# EAGLE board untitled (EAGLE 8.1.1), part 1 of 18
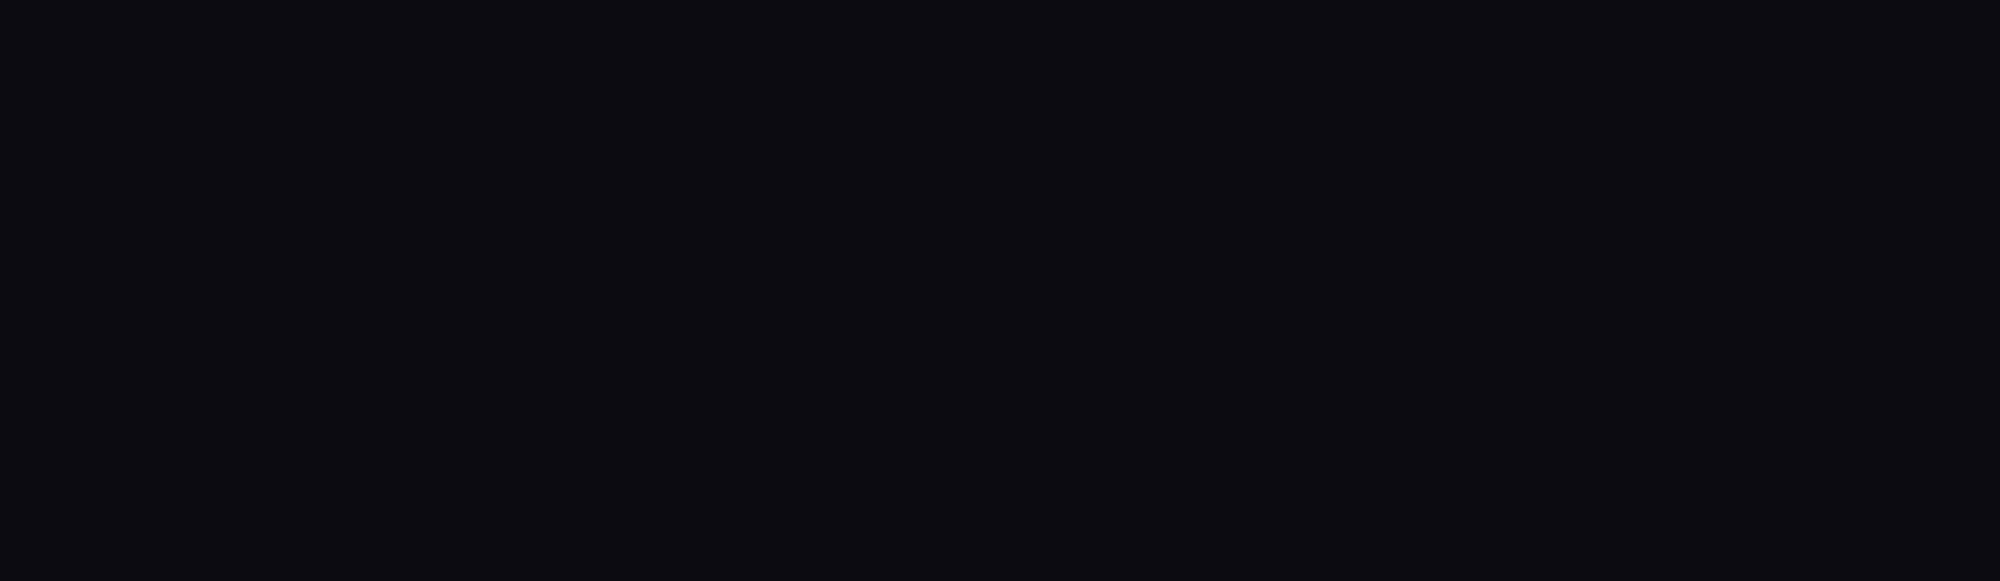
[diagram p0: board, top side]
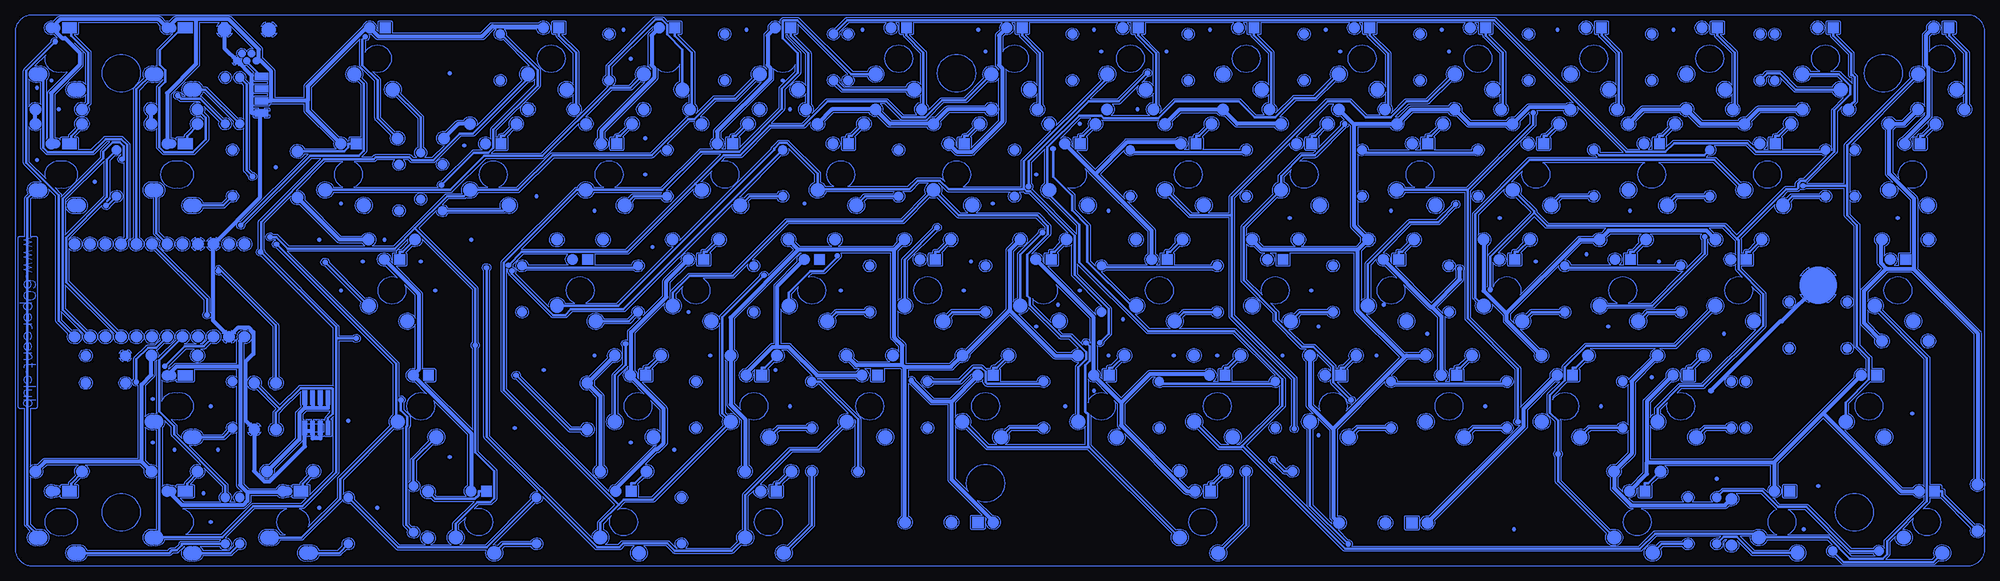
[diagram p1: board, bottom side, seen from below]

No outline drawn. Coordinates in mm, seen from the top.
Copper layers (1*16): Top 0.035mm / dielectric 1.5mm / Bottom 0.035mm
Design rules "default": minimum track width 10mil, minimum drill 24mil, track to track 8mil, track to pad 8mil, pad to pad 8mil, via to via 8mil, smd to smd 8mil, copper to edge 40mil, drill to drill 8mil, minimum pad ring 10mil, minimum via ring 8mil, stop-mask expansion 4mil, vias tented up to drill 0mil, thermal gap 10mil

## Placement (x,y rotation side)

## Tracks (layer width: path | path; a pad name or v marks a point on that pad's centre or on a via)
S$1
  Bottom 0: 2.47,90.26 2.3,90.29
S$2
  Bottom 0: 2.3,90.29 2.12,90.33
S$3
  Bottom 0: 2.12,90.33 1.95,90.39
S$4
  Bottom 0: 1.95,90.39 1.79,90.45
S$5
  Bottom 0: 1.79,90.45 1.62,90.53
S$6
  Bottom 0: 1.62,90.53 1.47,90.62
S$7
  Bottom 0: 1.47,90.62 1.32,90.71
S$8
  Bottom 0: 1.32,90.71 1.17,90.82
S$9
  Bottom 0: 1.17,90.82 1.03,90.93
S$10
  Bottom 0: 1.03,90.93 0.9,91.05
S$11
  Bottom 0: 0.9,91.05 0.78,91.19
S$12
  Bottom 0: 0.78,91.19 0.67,91.32
S$13
  Bottom 0: 0.67,91.32 0.56,91.47
S$14
  Bottom 0: 0.56,91.47 0.46,91.62
S$15
  Bottom 0: 0.46,91.62 0.38,91.78
S$16
  Bottom 0: 0.38,91.78 0.3,91.94
S$17
  Bottom 0: 0.3,91.94 0.23,92.11
S$18
  Bottom 0: 0.23,92.11 0.17,92.28
S$19
  Bottom 0: 0.17,92.28 0.13,92.45
S$20
  Bottom 0: 0.13,92.45 0.09,92.62
S$21
  Bottom 0: 0.09,92.62 0.09,92.65
S$22
  Bottom 0: 0.09,92.65 0.09,177.18
S$23
  Bottom 0: 0.09,177.18 0.09,178.37
S$24
  Bottom 0: 0.09,178.37 0.13,178.55
S$25
  Bottom 0: 0.13,178.55 0.17,178.72
S$26
  Bottom 0: 0.17,178.72 0.23,178.89
S$27
  Bottom 0: 0.23,178.89 0.29,179.06
S$28
  Bottom 0: 0.29,179.06 0.37,179.22
S$29
  Bottom 0: 0.37,179.22 0.45,179.38
S$30
  Bottom 0: 0.45,179.38 0.55,179.53
S$31
  Bottom 0: 0.55,179.53 0.65,179.68
S$32
  Bottom 0: 0.65,179.68 0.77,179.81
S$33
  Bottom 0: 0.77,179.81 0.89,179.94
S$34
  Bottom 0: 0.89,179.94 1.02,180.07
S$35
  Bottom 0: 1.02,180.07 1.16,180.18
S$36
  Bottom 0: 1.16,180.18 1.3,180.29
S$37
  Bottom 0: 1.3,180.29 1.46,180.39
S$38
  Bottom 0: 1.46,180.39 1.61,180.47
S$39
  Bottom 0: 1.61,180.47 1.77,180.55
S$40
  Bottom 0: 1.77,180.55 1.94,180.61
S$41
  Bottom 0: 1.94,180.61 2.11,180.67
S$42
  Bottom 0: 2.11,180.67 2.29,180.72
S$43
  Bottom 0: 2.29,180.72 2.46,180.75
S$44
  Bottom 0: 2.46,180.75 2.48,180.75
S$45
  Bottom 0: 2.48,180.75 2.47,180.76
S$46
  Bottom 0: 2.47,180.76 321.59,180.76
S$47
  Bottom 0: 321.59,180.76 321.59,180.75
S$48
  Bottom 0: 321.59,180.75 321.77,180.72
S$49
  Bottom 0: 321.77,180.72 321.94,180.68
S$50
  Bottom 0: 321.94,180.68 322.12,180.62
S$51
  Bottom 0: 322.12,180.62 322.28,180.55
S$52
  Bottom 0: 322.28,180.55 322.45,180.48
S$53
  Bottom 0: 322.45,180.48 322.6,180.39
S$54
  Bottom 0: 322.6,180.39 322.75,180.3
S$55
  Bottom 0: 322.75,180.3 322.9,180.19
S$56
  Bottom 0: 322.9,180.19 323.04,180.08
S$57
  Bottom 0: 323.04,180.08 323.17,179.95
S$58
  Bottom 0: 323.17,179.95 323.29,179.83
S$59
  Bottom 0: 323.29,179.83 323.41,179.69
S$60
  Bottom 0: 323.41,179.69 323.51,179.55
S$61
  Bottom 0: 323.51,179.55 323.61,179.39
S$62
  Bottom 0: 323.61,179.39 323.7,179.23
S$63
  Bottom 0: 323.7,179.23 323.77,179.07
S$64
  Bottom 0: 323.77,179.07 323.84,178.91
S$65
  Bottom 0: 323.84,178.91 323.9,178.74
S$66
  Bottom 0: 323.9,178.74 323.94,178.56
S$67
  Bottom 0: 323.94,178.56 323.98,178.39
S$68
  Bottom 0: 323.98,178.39 323.98,92.64
S$69
  Bottom 0: 323.98,92.64 323.95,92.47
S$70
  Bottom 0: 323.95,92.47 323.9,92.29
S$71
  Bottom 0: 323.9,92.29 323.85,92.12
S$72
  Bottom 0: 323.85,92.12 323.78,91.95
S$73
  Bottom 0: 323.78,91.95 323.7,91.79
S$74
  Bottom 0: 323.7,91.79 323.62,91.63
S$75
  Bottom 0: 323.62,91.63 323.52,91.48
S$76
  Bottom 0: 323.52,91.48 323.42,91.33
S$77
  Bottom 0: 323.42,91.33 323.3,91.2
S$78
  Bottom 0: 323.3,91.2 323.18,91.06
S$79
  Bottom 0: 323.18,91.06 323.05,90.94
S$80
  Bottom 0: 323.05,90.94 322.92,90.83
S$81
  Bottom 0: 322.92,90.83 322.77,90.72
S$82
  Bottom 0: 322.77,90.72 322.62,90.63
S$83
  Bottom 0: 322.62,90.63 322.46,90.54
S$84
  Bottom 0: 322.46,90.54 322.3,90.46
S$85
  Bottom 0: 322.3,90.46 322.13,90.39
S$86
  Bottom 0: 322.13,90.39 321.96,90.34
S$87
  Bottom 0: 321.96,90.34 321.79,90.29
S$88
  Bottom 0: 321.79,90.29 321.61,90.26
S$89
  Bottom 0: 321.61,90.26 321.59,90.26
S$90
  Bottom 0: 321.59,90.26 2.47,90.26
S$91
  Bottom 0: 8.56,90.4 23.3,90.4
S$92
  Bottom 0: 23.3,90.4 23.37,90.4
S$93
  Bottom 0: 23.37,90.4 23.44,90.42
S$94
  Bottom 0: 23.44,90.42 23.5,90.44
S$95
  Bottom 0: 23.5,90.44 23.56,90.48
S$96
  Bottom 0: 23.56,90.48 23.62,90.53
S$97
  Bottom 0: 23.62,90.53 24.77,91.68
S$98
  Bottom 0: 24.77,91.68 24.87,91.65
S$99
  Bottom 0: 24.87,91.65 25.18,91.63
S$100
  Bottom 0: 25.18,91.63 25.47,91.69
S$101
  Bottom 0: 25.47,91.69 25.73,91.85
S$102
  Bottom 0: 25.73,91.85 25.94,92.06
S$103
  Bottom 0: 25.94,92.06 26.07,92.34
S$104
  Bottom 0: 26.07,92.34 26.12,92.64
S$105
  Bottom 0: 26.12,92.64 26.07,92.94
S$106
  Bottom 0: 26.07,92.94 25.94,93.21
S$107
  Bottom 0: 25.94,93.21 25.73,93.43
S$108
  Bottom 0: 25.73,93.43 25.47,93.58
S$109
  Bottom 0: 25.47,93.58 25.18,93.65
S$110
  Bottom 0: 25.18,93.65 25.14,93.64
S$111
  Bottom 0: 25.14,93.64 25.92,94.43
S$112
  Bottom 0: 25.92,94.43 35.92,94.43
S$113
  Bottom 0: 35.92,94.43 35.94,94.36
S$114
  Bottom 0: 35.94,94.36 36.11,94.05
S$115
  Bottom 0: 36.11,94.05 36.35,93.79
S$116
  Bottom 0: 36.35,93.79 36.65,93.6
S$117
  Bottom 0: 36.65,93.6 36.98,93.5
S$118
  Bottom 0: 36.98,93.5 37.33,93.48
S$119
  Bottom 0: 37.33,93.48 37.67,93.54
S$120
  Bottom 0: 37.67,93.54 37.99,93.69
S$121
  Bottom 0: 37.99,93.69 38.26,93.91
S$122
  Bottom 0: 38.26,93.91 38.47,94.2
S$123
  Bottom 0: 38.47,94.2 38.59,94.52
S$124
  Bottom 0: 38.59,94.52 38.64,94.87
S$125
  Bottom 0: 38.64,94.87 38.61,95.08
S$126
  Bottom 0: 38.61,95.08 40.34,95.08
S$127
  Bottom 0: 40.34,95.08 38.03,92.77
S$128
  Bottom 0: 38.03,92.77 32.21,92.77
S$129
  Bottom 0: 32.21,92.77 32.12,93
S$130
  Bottom 0: 32.12,93 31.91,93.28
S$131
  Bottom 0: 31.91,93.28 31.64,93.51
S$132
  Bottom 0: 31.64,93.51 31.32,93.66
S$133
  Bottom 0: 31.32,93.66 30.98,93.72
S$134
  Bottom 0: 30.98,93.72 30.62,93.7
S$135
  Bottom 0: 30.62,93.7 30.3,93.59
S$136
  Bottom 0: 30.3,93.59 30,93.41
S$137
  Bottom 0: 30,93.41 29.76,93.15
S$138
  Bottom 0: 29.76,93.15 29.59,92.84
S$139
  Bottom 0: 29.59,92.84 29.5,92.5
S$140
  Bottom 0: 29.5,92.5 29.5,92.16
S$141
  Bottom 0: 29.5,92.16 29.59,91.82
S$142
  Bottom 0: 29.59,91.82 29.76,91.51
S$143
  Bottom 0: 29.76,91.51 30,91.25
S$144
  Bottom 0: 30,91.25 30.3,91.06
S$145
  Bottom 0: 30.3,91.06 30.62,90.96
S$146
  Bottom 0: 30.62,90.96 30.98,90.94
S$147
  Bottom 0: 30.98,90.94 31.32,91
S$148
  Bottom 0: 31.32,91 31.64,91.15
S$149
  Bottom 0: 31.64,91.15 31.91,91.37
S$150
  Bottom 0: 31.91,91.37 32.12,91.66
S$151
  Bottom 0: 32.12,91.66 32.21,91.89
S$152
  Bottom 0: 32.21,91.89 38.22,91.89
S$153
  Bottom 0: 38.22,91.89 38.29,91.89
S$154
  Bottom 0: 38.29,91.89 38.35,91.91
S$155
  Bottom 0: 38.35,91.91 38.41,91.93
S$156
  Bottom 0: 38.41,91.93 38.48,91.97
S$157
  Bottom 0: 38.48,91.97 38.53,92.01
S$158
  Bottom 0: 38.53,92.01 40.82,94.31
S$159
  Bottom 0: 40.82,94.31 40.67,94.07
S$160
  Bottom 0: 40.67,94.07 40.59,93.76
S$161
  Bottom 0: 40.59,93.76 40.59,93.43
S$162
  Bottom 0: 40.59,93.43 40.67,93.12
S$163
  Bottom 0: 40.67,93.12 40.85,92.84
S$164
  Bottom 0: 40.85,92.84 41.08,92.62
S$165
  Bottom 0: 41.08,92.62 41.37,92.47
S$166
  Bottom 0: 41.37,92.47 41.69,92.41
S$167
  Bottom 0: 41.69,92.41 42.01,92.43
S$168
  Bottom 0: 42.01,92.43 42.32,92.53
S$169
  Bottom 0: 42.32,92.53 42.58,92.72
S$170
  Bottom 0: 42.58,92.72 42.79,92.97
S$171
  Bottom 0: 42.79,92.97 42.92,93.27
S$172
  Bottom 0: 42.92,93.27 42.96,93.59
S$173
  Bottom 0: 42.96,93.59 42.92,93.91
S$174
  Bottom 0: 42.92,93.91 42.79,94.21
S$175
  Bottom 0: 42.79,94.21 42.58,94.47
S$176
  Bottom 0: 42.58,94.47 42.51,94.52
S$177
  Bottom 0: 42.51,94.52 42.84,94.52
S$178
  Bottom 0: 42.84,94.52 43.2,94.16
S$179
  Bottom 0: 43.2,94.16 43.14,93.98
S$180
  Bottom 0: 43.14,93.98 43.14,93.67
S$181
  Bottom 0: 43.14,93.67 43.24,93.39
S$182
  Bottom 0: 43.24,93.39 43.4,93.14
S$183
  Bottom 0: 43.4,93.14 43.64,92.95
S$184
  Bottom 0: 43.64,92.95 43.92,92.84
S$185
  Bottom 0: 43.92,92.84 44.23,92.82
S$186
  Bottom 0: 44.23,92.82 44.52,92.88
S$187
  Bottom 0: 44.52,92.88 44.78,93.03
S$188
  Bottom 0: 44.78,93.03 44.99,93.25
S$189
  Bottom 0: 44.99,93.25 45.12,93.53
S$190
  Bottom 0: 45.12,93.53 45.17,93.83
S$191
  Bottom 0: 45.17,93.83 45.12,94.13
S$192
  Bottom 0: 45.12,94.13 44.99,94.4
S$193
  Bottom 0: 44.99,94.4 44.78,94.62
S$194
  Bottom 0: 44.78,94.62 44.52,94.77
S$195
  Bottom 0: 44.52,94.77 44.23,94.84
S$196
  Bottom 0: 44.23,94.84 43.92,94.82
S$197
  Bottom 0: 43.92,94.82 43.82,94.78
S$198
  Bottom 0: 43.82,94.78 43.52,95.08
S$199
  Bottom 0: 43.52,95.08 54.09,95.08
S$200
  Bottom 0: 54.09,95.08 56.48,92.69
S$201
  Bottom 0: 56.48,92.69 56.53,92.65
S$202
  Bottom 0: 56.53,92.65 56.6,92.61
S$203
  Bottom 0: 56.6,92.61 56.66,92.59
S$204
  Bottom 0: 56.66,92.59 56.72,92.57
S$205
  Bottom 0: 56.72,92.57 56.79,92.57
S$206
  Bottom 0: 56.79,92.57 105.25,92.57
S$207
  Bottom 0: 105.25,92.57 105.32,92.57
S$208
  Bottom 0: 105.32,92.57 105.39,92.59
S$209
  Bottom 0: 105.39,92.59 105.45,92.61
S$210
  Bottom 0: 105.45,92.61 105.51,92.65
S$211
  Bottom 0: 105.51,92.65 105.56,92.69
S$212
  Bottom 0: 105.56,92.69 122.2,109.34
S$213
  Bottom 0: 122.2,109.34 122.26,109.31
S$214
  Bottom 0: 122.26,109.31 122.33,109.3
S$215
  Bottom 0: 122.33,109.3 122.4,109.29
S$216
  Bottom 0: 122.4,109.29 125.92,109.29
S$217
  Bottom 0: 125.92,109.29 125.99,109.3
S$218
  Bottom 0: 125.99,109.3 126.06,109.31
S$219
  Bottom 0: 126.06,109.31 126.12,109.34
S$220
  Bottom 0: 126.12,109.34 126.18,109.38
S$221
  Bottom 0: 126.18,109.38 126.24,109.42
S$222
  Bottom 0: 126.24,109.42 129.49,112.67
S$223
  Bottom 0: 129.49,112.67 129.51,112.65
S$224
  Bottom 0: 129.51,112.65 129.84,112.55
S$225
  Bottom 0: 129.84,112.55 130.19,112.53
S$226
  Bottom 0: 130.19,112.53 130.54,112.59
S$227
  Bottom 0: 130.54,112.59 130.85,112.74
S$228
  Bottom 0: 130.85,112.74 131.12,112.96
S$229
  Bottom 0: 131.12,112.96 131.33,113.25
S$230
  Bottom 0: 131.33,113.25 131.46,113.57
S$231
  Bottom 0: 131.46,113.57 131.51,113.92
S$232
  Bottom 0: 131.51,113.92 131.46,114.26
S$233
  Bottom 0: 131.46,114.26 131.33,114.59
S$234
  Bottom 0: 131.33,114.59 131.12,114.87
S$235
  Bottom 0: 131.12,114.87 130.85,115.1
S$236
  Bottom 0: 130.85,115.1 130.54,115.25
S$237
  Bottom 0: 130.54,115.25 130.19,115.31
S$238
  Bottom 0: 130.19,115.31 129.84,115.29
S$239
  Bottom 0: 129.84,115.29 129.51,115.18
S$240
  Bottom 0: 129.51,115.18 129.22,115
S$241
  Bottom 0: 129.22,115 128.98,114.74
S$242
  Bottom 0: 128.98,114.74 128.81,114.43
S$243
  Bottom 0: 128.81,114.43 128.72,114.09
S$244
  Bottom 0: 128.72,114.09 128.72,113.75
S$245
  Bottom 0: 128.72,113.75 128.81,113.41
S$246
  Bottom 0: 128.81,113.41 128.86,113.3
S$247
  Bottom 0: 128.86,113.3 125.73,110.17
S$248
  Bottom 0: 125.73,110.17 124.45,110.17
S$249
  Bottom 0: 124.45,110.17 124.5,110.2
S$250
  Bottom 0: 124.5,110.2 124.78,110.42
S$251
  Bottom 0: 124.78,110.42 124.98,110.71
S$252
  Bottom 0: 124.98,110.71 125.11,111.03
S$253
  Bottom 0: 125.11,111.03 125.16,111.38
S$254
  Bottom 0: 125.16,111.38 125.11,111.72
S$255
  Bottom 0: 125.11,111.72 124.98,112.05
S$256
  Bottom 0: 124.98,112.05 124.78,112.33
S$257
  Bottom 0: 124.78,112.33 124.5,112.56
S$258
  Bottom 0: 124.5,112.56 124.19,112.71
S$259
  Bottom 0: 124.19,112.71 123.84,112.77
S$260
  Bottom 0: 123.84,112.77 123.5,112.75
S$261
  Bottom 0: 123.5,112.75 123.17,112.64
S$262
  Bottom 0: 123.17,112.64 122.87,112.46
S$263
  Bottom 0: 122.87,112.46 122.63,112.2
S$264
  Bottom 0: 122.63,112.2 122.46,111.89
S$265
  Bottom 0: 122.46,111.89 122.37,111.55
S$266
  Bottom 0: 122.37,111.55 122.37,111.21
S$267
  Bottom 0: 122.37,111.21 122.46,110.87
S$268
  Bottom 0: 122.46,110.87 122.63,110.56
S$269
  Bottom 0: 122.63,110.56 122.87,110.3
S$270
  Bottom 0: 122.87,110.3 123.07,110.17
S$271
  Bottom 0: 123.07,110.17 122.58,110.17
S$272
  Bottom 0: 122.58,110.17 116.03,116.73
S$273
  Bottom 0: 116.03,116.73 116.03,119.83
S$274
  Bottom 0: 116.03,119.83 116.04,119.81
S$275
  Bottom 0: 116.04,119.81 116.28,119.62
S$276
  Bottom 0: 116.28,119.62 116.56,119.51
S$277
  Bottom 0: 116.56,119.51 116.86,119.49
S$278
  Bottom 0: 116.86,119.49 117.16,119.56
S$279
  Bottom 0: 117.16,119.56 117.36,119.67
S$280
  Bottom 0: 117.36,119.67 135.26,119.67
S$281
  Bottom 0: 135.26,119.67 135.33,119.62
S$282
  Bottom 0: 135.33,119.62 135.61,119.51
S$283
  Bottom 0: 135.61,119.51 135.91,119.49
S$284
  Bottom 0: 135.91,119.49 136.21,119.56
S$285
  Bottom 0: 136.21,119.56 136.47,119.71
S$286
  Bottom 0: 136.47,119.71 136.67,119.93
S$287
  Bottom 0: 136.67,119.93 136.8,120.2
S$288
  Bottom 0: 136.8,120.2 136.85,120.5
S$289
  Bottom 0: 136.85,120.5 136.8,120.8
S$290
  Bottom 0: 136.8,120.8 136.67,121.08
S$291
  Bottom 0: 136.67,121.08 136.53,121.23
S$292
  Bottom 0: 136.53,121.23 137.12,121.23
S$293
  Bottom 0: 137.12,121.23 141.54,116.8
S$294
  Bottom 0: 141.54,116.8 141.54,113.54
S$295
  Bottom 0: 141.54,113.54 133.69,105.69
S$296
  Bottom 0: 133.69,105.69 133.7,105.74
S$297
  Bottom 0: 133.7,105.74 133.66,106.06
S$298
  Bottom 0: 133.66,106.06 133.53,106.36
S$299
  Bottom 0: 133.53,106.36 133.32,106.61
S$300
  Bottom 0: 133.32,106.61 133.06,106.8
S$301
  Bottom 0: 133.06,106.8 132.75,106.91
S$302
  Bottom 0: 132.75,106.91 132.43,106.93
S$303
  Bottom 0: 132.43,106.93 132.1,106.86
S$304
  Bottom 0: 132.1,106.86 131.82,106.72
S$305
  Bottom 0: 131.82,106.72 131.58,106.49
S$306
  Bottom 0: 131.58,106.49 131.41,106.22
S$307
  Bottom 0: 131.41,106.22 131.32,105.9
S$308
  Bottom 0: 131.32,105.9 131.32,105.58
S$309
  Bottom 0: 131.32,105.58 131.41,105.26
S$310
  Bottom 0: 131.41,105.26 131.58,104.99
S$311
  Bottom 0: 131.58,104.99 131.82,104.77
S$312
  Bottom 0: 131.82,104.77 132.1,104.62
S$313
  Bottom 0: 132.1,104.62 132.43,104.55
S$314
  Bottom 0: 132.43,104.55 132.56,104.56
S$315
  Bottom 0: 132.56,104.56 131.06,103.06
S$316
  Bottom 0: 131.06,103.06 130.94,103.06
S$317
  Bottom 0: 130.94,103.06 130.91,103.11
S$318
  Bottom 0: 130.91,103.11 130.7,103.35
S$319
  Bottom 0: 130.7,103.35 130.43,103.53
S$320
  Bottom 0: 130.43,103.53 130.12,103.62
S$321
  Bottom 0: 130.12,103.62 129.79,103.62
S$322
  Bottom 0: 129.79,103.62 129.48,103.53
S$323
  Bottom 0: 129.48,103.53 129.21,103.35
S$324
  Bottom 0: 129.21,103.35 129,103.11
S$325
  Bottom 0: 129,103.11 128.86,102.81
S$326
  Bottom 0: 128.86,102.81 128.81,102.49
S$327
  Bottom 0: 128.81,102.49 128.86,102.17
S$328
  Bottom 0: 128.86,102.17 129,101.87
S$329
  Bottom 0: 129,101.87 129.21,101.62
S$330
  Bottom 0: 129.21,101.62 129.48,101.45
S$331
  Bottom 0: 129.48,101.45 129.79,101.36
S$332
  Bottom 0: 129.79,101.36 130.12,101.36
S$333
  Bottom 0: 130.12,101.36 130.43,101.45
S$334
  Bottom 0: 130.43,101.45 130.7,101.62
S$335
  Bottom 0: 130.7,101.62 130.91,101.87
S$336
  Bottom 0: 130.91,101.87 130.94,101.92
S$337
  Bottom 0: 130.94,101.92 131.29,101.92
S$338
  Bottom 0: 131.29,101.92 131.39,101.92
S$339
  Bottom 0: 131.39,101.92 131.47,101.94
S$340
  Bottom 0: 131.47,101.94 131.56,101.98
S$341
  Bottom 0: 131.56,101.98 131.63,102.03
S$342
  Bottom 0: 131.63,102.03 131.7,102.09
S$343
  Bottom 0: 131.7,102.09 141.52,111.91
S$344
  Bottom 0: 141.52,111.91 141.51,111.89
S$345
  Bottom 0: 141.51,111.89 141.42,111.55
S$346
  Bottom 0: 141.42,111.55 141.42,111.21
S$347
  Bottom 0: 141.42,111.21 141.51,110.87
S$348
  Bottom 0: 141.51,110.87 141.68,110.56
S$349
  Bottom 0: 141.68,110.56 141.92,110.3
S$350
  Bottom 0: 141.92,110.3 142.22,110.11
S$351
  Bottom 0: 142.22,110.11 142.54,110.01
S$352
  Bottom 0: 142.54,110.01 142.9,109.99
S$353
  Bottom 0: 142.9,109.99 143.24,110.05
S$354
  Bottom 0: 143.24,110.05 143.55,110.2
S$355
  Bottom 0: 143.55,110.2 143.82,110.42
S$356
  Bottom 0: 143.82,110.42 144.03,110.71
S$357
  Bottom 0: 144.03,110.71 144.16,111.03
S$358
  Bottom 0: 144.16,111.03 144.21,111.38
S$359
  Bottom 0: 144.21,111.38 144.16,111.72
S$360
  Bottom 0: 144.16,111.72 144.03,112.05
S$361
  Bottom 0: 144.03,112.05 143.82,112.33
S$362
  Bottom 0: 143.82,112.33 143.55,112.56
S$363
  Bottom 0: 143.55,112.56 143.24,112.71
S$364
  Bottom 0: 143.24,112.71 142.9,112.77
S$365
  Bottom 0: 142.9,112.77 142.54,112.75
S$366
  Bottom 0: 142.54,112.75 142.28,112.66
S$367
  Bottom 0: 142.28,112.66 142.51,112.9
S$368
  Bottom 0: 142.51,112.9 142.57,112.97
S$369
  Bottom 0: 142.57,112.97 142.62,113.05
S$370
  Bottom 0: 142.62,113.05 142.66,113.13
S$371
  Bottom 0: 142.66,113.13 142.68,113.21
S$372
  Bottom 0: 142.68,113.21 142.68,113.3
S$373
  Bottom 0: 142.68,113.3 142.68,116.8
S$374
  Bottom 0: 142.68,116.8 143.27,117.38
S$375
  Bottom 0: 143.27,117.38 143.23,117.33
S$376
  Bottom 0: 143.23,117.33 143.11,116.91
S$377
  Bottom 0: 143.11,116.91 143.06,116.46
S$378
  Bottom 0: 143.06,116.46 143.11,116.01
S$379
  Bottom 0: 143.11,116.01 143.23,115.58
S$380
  Bottom 0: 143.23,115.58 143.45,115.19
S$381
  Bottom 0: 143.45,115.19 143.73,114.84
S$382
  Bottom 0: 143.73,114.84 144.08,114.56
S$383
  Bottom 0: 144.08,114.56 144.47,114.35
S$384
  Bottom 0: 144.47,114.35 144.9,114.22
S$385
  Bottom 0: 144.9,114.22 145.35,114.17
S$386
  Bottom 0: 145.35,114.17 145.8,114.22
S$387
  Bottom 0: 145.8,114.22 146.22,114.35
S$388
  Bottom 0: 146.22,114.35 146.62,114.56
S$389
  Bottom 0: 146.62,114.56 146.96,114.84
S$390
  Bottom 0: 146.96,114.84 147.09,115
S$391
  Bottom 0: 147.09,115 147.09,110.09
S$392
  Bottom 0: 147.09,110.09 147.06,110.07
S$393
  Bottom 0: 147.06,110.07 133.11,96.11
S$394
  Bottom 0: 133.11,96.11 132.93,96.2
S$395
  Bottom 0: 132.93,96.2 132.58,96.26
S$396
  Bottom 0: 132.58,96.26 132.23,96.24
S$397
  Bottom 0: 132.23,96.24 131.9,96.13
S$398
  Bottom 0: 131.9,96.13 131.61,95.95
S$399
  Bottom 0: 131.61,95.95 131.37,95.69
S$400
  Bottom 0: 131.37,95.69 131.2,95.38
S$401
  Bottom 0: 131.2,95.38 131.11,95.04
S$402
  Bottom 0: 131.11,95.04 131.11,94.7
S$403
  Bottom 0: 131.11,94.7 131.2,94.36
S$404
  Bottom 0: 131.2,94.36 131.37,94.05
S$405
  Bottom 0: 131.37,94.05 131.61,93.79
S$406
  Bottom 0: 131.61,93.79 131.9,93.6
S$407
  Bottom 0: 131.9,93.6 132.23,93.5
S$408
  Bottom 0: 132.23,93.5 132.58,93.48
S$409
  Bottom 0: 132.58,93.48 132.93,93.54
S$410
  Bottom 0: 132.93,93.54 133.24,93.69
S$411
  Bottom 0: 133.24,93.69 133.51,93.91
S$412
  Bottom 0: 133.51,93.91 133.72,94.2
S$413
  Bottom 0: 133.72,94.2 133.85,94.52
S$414
  Bottom 0: 133.85,94.52 133.89,94.87
S$415
  Bottom 0: 133.89,94.87 133.85,95.21
S$416
  Bottom 0: 133.85,95.21 133.74,95.48
S$417
  Bottom 0: 133.74,95.48 147.56,109.31
S$418
  Bottom 0: 147.56,109.31 164.04,109.31
S$419
  Bottom 0: 164.04,109.31 164.11,109.32
S$420
  Bottom 0: 164.11,109.32 164.18,109.33
S$421
  Bottom 0: 164.18,109.33 164.24,109.36
S$422
  Bottom 0: 164.24,109.36 164.3,109.4
S$423
  Bottom 0: 164.3,109.4 164.36,109.44
S$424
  Bottom 0: 164.36,109.44 167.59,112.67
S$425
  Bottom 0: 167.59,112.67 167.62,112.65
S$426
  Bottom 0: 167.62,112.65 167.94,112.55
S$427
  Bottom 0: 167.94,112.55 168.29,112.53
S$428
  Bottom 0: 168.29,112.53 168.64,112.59
S$429
  Bottom 0: 168.64,112.59 168.96,112.74
S$430
  Bottom 0: 168.96,112.74 169.22,112.96
S$431
  Bottom 0: 169.22,112.96 169.41,113.21
S$432
  Bottom 0: 169.41,113.21 169.41,104.61
S$433
  Bottom 0: 169.41,104.61 167.25,102.45
S$434
  Bottom 0: 167.25,102.45 167.39,102.76
S$435
  Bottom 0: 167.39,102.76 167.51,103.26
S$436
  Bottom 0: 167.51,103.26 167.55,103.77
S$437
  Bottom 0: 167.55,103.77 167.51,104.29
S$438
  Bottom 0: 167.51,104.29 167.39,104.79
S$439
  Bottom 0: 167.39,104.79 167.18,105.27
S$440
  Bottom 0: 167.18,105.27 166.89,105.7
S$441
  Bottom 0: 166.89,105.7 166.54,106.08
S$442
  Bottom 0: 166.54,106.08 166.13,106.4
S$443
  Bottom 0: 166.13,106.4 165.68,106.64
S$444
  Bottom 0: 165.68,106.64 165.19,106.81
S$445
  Bottom 0: 165.19,106.81 164.68,106.9
S$446
  Bottom 0: 164.68,106.9 164.16,106.9
S$447
  Bottom 0: 164.16,106.9 163.65,106.81
S$448
  Bottom 0: 163.65,106.81 163.16,106.64
S$449
  Bottom 0: 163.16,106.64 162.71,106.4
S$450
  Bottom 0: 162.71,106.4 162.3,106.08
S$451
  Bottom 0: 162.3,106.08 161.94,105.7
S$452
  Bottom 0: 161.94,105.7 161.66,105.27
S$453
  Bottom 0: 161.66,105.27 161.45,104.79
S$454
  Bottom 0: 161.45,104.79 161.33,104.29
S$455
  Bottom 0: 161.33,104.29 161.28,103.77
S$456
  Bottom 0: 161.28,103.77 161.33,103.26
S$457
  Bottom 0: 161.33,103.26 161.45,102.76
S$458
  Bottom 0: 161.45,102.76 161.66,102.28
S$459
  Bottom 0: 161.66,102.28 161.94,101.85
S$460
  Bottom 0: 161.94,101.85 162.3,101.47
S$461
  Bottom 0: 162.3,101.47 162.71,101.15
S$462
  Bottom 0: 162.71,101.15 163.16,100.9
S$463
  Bottom 0: 163.16,100.9 163.65,100.74
S$464
  Bottom 0: 163.65,100.74 164.16,100.65
S$465
  Bottom 0: 164.16,100.65 164.68,100.65
S$466
  Bottom 0: 164.68,100.65 165.19,100.74
S$467
  Bottom 0: 165.19,100.74 165.68,100.9
S$468
  Bottom 0: 165.68,100.9 165.74,100.94
S$469
  Bottom 0: 165.74,100.94 163.34,98.54
S$470
  Bottom 0: 163.34,98.54 163.07,98.55
S$471
  Bottom 0: 163.07,98.55 162.75,98.49
S$472
  Bottom 0: 162.75,98.49 162.46,98.34
S$473
  Bottom 0: 162.46,98.34 162.22,98.11
S$474
  Bottom 0: 162.22,98.11 162.05,97.84
S$475
  Bottom 0: 162.05,97.84 161.97,97.53
S$476
  Bottom 0: 161.97,97.53 161.97,97.2
S$477
  Bottom 0: 161.97,97.2 162.05,96.89
S$478
  Bottom 0: 162.05,96.89 162.22,96.61
S$479
  Bottom 0: 162.22,96.61 162.46,96.39
S$480
  Bottom 0: 162.46,96.39 162.75,96.24
S$481
  Bottom 0: 162.75,96.24 163.07,96.17
S$482
  Bottom 0: 163.07,96.17 163.39,96.19
S$483
  Bottom 0: 163.39,96.19 163.7,96.3
S$484
  Bottom 0: 163.7,96.3 163.96,96.49
S$485
  Bottom 0: 163.96,96.49 164.17,96.74
S$486
  Bottom 0: 164.17,96.74 164.3,97.04
S$487
  Bottom 0: 164.3,97.04 164.34,97.36
S$488
  Bottom 0: 164.34,97.36 164.3,97.68
S$489
  Bottom 0: 164.3,97.68 164.24,97.83
S$490
  Bottom 0: 164.24,97.83 164.49,98.08
S$491
  Bottom 0: 164.49,98.08 164.49,96.42
S$492
  Bottom 0: 164.49,96.42 164.5,96.35
S$493
  Bottom 0: 164.5,96.35 164.54,96.28
S$494
  Bottom 0: 164.54,96.28 164.6,96.22
S$495
  Bottom 0: 164.6,96.22 164.67,96.18
S$496
  Bottom 0: 164.67,96.18 164.74,96.17
S$497
  Bottom 0: 164.74,96.17 166.62,96.17
S$498
  Bottom 0: 166.62,96.17 166.7,96.18
S$499
  Bottom 0: 166.7,96.18 166.77,96.22
S$500
  Bottom 0: 166.77,96.22 166.83,96.28
S$501
  Bottom 0: 166.83,96.28 166.87,96.35
S$502
  Bottom 0: 166.87,96.35 166.88,96.42
S$503
  Bottom 0: 166.88,96.42 166.88,98.3
S$504
  Bottom 0: 166.88,98.3 166.87,98.38
S$505
  Bottom 0: 166.87,98.38 166.83,98.45
S$506
  Bottom 0: 166.83,98.45 166.77,98.51
S$507
  Bottom 0: 166.77,98.51 166.7,98.55
S$508
  Bottom 0: 166.7,98.55 166.62,98.56
S$509
  Bottom 0: 166.62,98.56 164.96,98.56
S$510
  Bottom 0: 164.96,98.56 170.38,103.97
S$511
  Bottom 0: 170.38,103.97 170.44,104.04
S$512
  Bottom 0: 170.44,104.04 170.49,104.11
S$513
  Bottom 0: 170.49,104.11 170.52,104.2
S$514
  Bottom 0: 170.52,104.2 170.54,104.28
S$515
  Bottom 0: 170.54,104.28 170.55,104.37
S$516
  Bottom 0: 170.55,104.37 170.55,116.66
S$517
  Bottom 0: 170.55,116.66 173.18,116.66
S$518
  Bottom 0: 173.18,116.66 173.27,116.67
S$519
  Bottom 0: 173.27,116.67 173.36,116.69
S$520
  Bottom 0: 173.36,116.69 173.44,116.72
S$521
  Bottom 0: 173.44,116.72 173.52,116.77
S$522
  Bottom 0: 173.52,116.77 173.58,116.83
S$523
  Bottom 0: 173.58,116.83 176.78,120.03
S$524
  Bottom 0: 176.78,120.03 176.95,120.08
S$525
  Bottom 0: 176.95,120.08 177.09,120.18
S$526
  Bottom 0: 177.09,120.18 177.09,98.4
S$527
  Bottom 0: 177.09,98.4 176.97,98.34
S$528
  Bottom 0: 176.97,98.34 176.73,98.11
S$529
  Bottom 0: 176.73,98.11 176.56,97.84
S$530
  Bottom 0: 176.56,97.84 176.47,97.53
S$531
  Bottom 0: 176.47,97.53 176.47,97.2
S$532
  Bottom 0: 176.47,97.2 176.56,96.89
S$533
  Bottom 0: 176.56,96.89 176.73,96.61
S$534
  Bottom 0: 176.73,96.61 176.97,96.39
S$535
  Bottom 0: 176.97,96.39 177.25,96.24
S$536
  Bottom 0: 177.25,96.24 177.57,96.17
S$537
  Bottom 0: 177.57,96.17 177.9,96.19
S$538
  Bottom 0: 177.9,96.19 178.2,96.3
S$539
  Bottom 0: 178.2,96.3 178.47,96.49
S$540
  Bottom 0: 178.47,96.49 178.68,96.74
S$541
  Bottom 0: 178.68,96.74 178.81,97.04
S$542
  Bottom 0: 178.81,97.04 178.85,97.36
S$543
  Bottom 0: 178.85,97.36 178.81,97.68
S$544
  Bottom 0: 178.81,97.68 178.68,97.98
S$545
  Bottom 0: 178.68,97.98 178.47,98.24
S$546
  Bottom 0: 178.47,98.24 178.23,98.41
S$547
  Bottom 0: 178.23,98.41 178.23,122.49
S$548
  Bottom 0: 178.23,122.49 178.32,122.59
S$549
  Bottom 0: 178.32,122.59 181.1,122.59
S$550
  Bottom 0: 181.1,122.59 181.09,122.58
S$551
  Bottom 0: 181.09,122.58 181.05,122.5
S$552
  Bottom 0: 181.05,122.5 181.04,122.43
S$553
  Bottom 0: 181.04,122.43 181.04,120.65
S$554
  Bottom 0: 181.04,120.65 181.05,120.57
S$555
  Bottom 0: 181.05,120.57 181.09,120.5
S$556
  Bottom 0: 181.09,120.5 181.14,120.45
S$557
  Bottom 0: 181.14,120.45 181.21,120.41
S$558
  Bottom 0: 181.21,120.41 181.29,120.4
S$559
  Bottom 0: 181.29,120.4 183.07,120.4
S$560
  Bottom 0: 183.07,120.4 183.14,120.41
S$561
  Bottom 0: 183.14,120.41 183.22,120.45
S$562
  Bottom 0: 183.22,120.45 183.27,120.5
S$563
  Bottom 0: 183.27,120.5 183.31,120.57
S$564
  Bottom 0: 183.31,120.57 183.32,120.65
S$565
  Bottom 0: 183.32,120.65 183.32,122.43
S$566
  Bottom 0: 183.32,122.43 183.31,122.5
S$567
  Bottom 0: 183.31,122.5 183.27,122.58
S$568
  Bottom 0: 183.27,122.58 183.26,122.59
S$569
  Bottom 0: 183.26,122.59 184.28,122.59
S$570
  Bottom 0: 184.28,122.59 184.25,122.58
S$571
  Bottom 0: 184.25,122.58 183.97,122.4
S$572
  Bottom 0: 183.97,122.4 183.76,122.16
S$573
  Bottom 0: 183.76,122.16 183.62,121.86
S$574
  Bottom 0: 183.62,121.86 183.58,121.54
S$575
  Bottom 0: 183.58,121.54 183.62,121.22
S$576
  Bottom 0: 183.62,121.22 183.76,120.92
S$577
  Bottom 0: 183.76,120.92 183.97,120.67
S$578
  Bottom 0: 183.97,120.67 184.25,120.5
S$579
  Bottom 0: 184.25,120.5 184.55,120.41
S$580
  Bottom 0: 184.55,120.41 184.88,120.41
S$581
  Bottom 0: 184.88,120.41 185.19,120.5
S$582
  Bottom 0: 185.19,120.5 185.47,120.67
S$583
  Bottom 0: 185.47,120.67 185.68,120.92
S$584
  Bottom 0: 185.68,120.92 185.7,120.97
S$585
  Bottom 0: 185.7,120.97 192.09,120.97
S$586
  Bottom 0: 192.09,120.97 192.07,120.94
S$587
  Bottom 0: 192.07,120.94 191.57,120.94
S$588
  Bottom 0: 191.57,120.94 191.5,120.94
S$589
  Bottom 0: 191.5,120.94 191.44,120.92
S$590
  Bottom 0: 191.44,120.92 191.37,120.9
S$591
  Bottom 0: 191.37,120.9 191.31,120.86
S$592
  Bottom 0: 191.31,120.86 191.26,120.82
S$593
  Bottom 0: 191.26,120.82 185.06,114.62
S$594
  Bottom 0: 185.06,114.62 185.02,114.56
S$595
  Bottom 0: 185.02,114.56 184.98,114.5
S$596
  Bottom 0: 184.98,114.5 184.95,114.44
S$597
  Bottom 0: 184.95,114.44 184.94,114.38
S$598
  Bottom 0: 184.94,114.38 184.93,114.31
S$599
  Bottom 0: 184.93,114.31 184.93,106.63
S$600
  Bottom 0: 184.93,106.63 184.87,106.61
S$601
  Bottom 0: 184.87,106.61 184.63,106.42
S$602
  Bottom 0: 184.63,106.42 184.46,106.17
S$603
  Bottom 0: 184.46,106.17 184.37,105.88
S$604
  Bottom 0: 184.37,105.88 184.37,105.58
S$605
  Bottom 0: 184.37,105.58 184.46,105.29
S$606
  Bottom 0: 184.46,105.29 184.63,105.04
S$607
  Bottom 0: 184.63,105.04 184.87,104.85
S$608
  Bottom 0: 184.87,104.85 185.15,104.74
S$609
  Bottom 0: 185.15,104.74 185.45,104.72
S$610
  Bottom 0: 185.45,104.72 185.75,104.78
S$611
  Bottom 0: 185.75,104.78 186.01,104.94
S$612
  Bottom 0: 186.01,104.94 186.21,105.16
S$613
  Bottom 0: 186.21,105.16 186.34,105.43
S$614
  Bottom 0: 186.34,105.43 186.39,105.73
S$615
  Bottom 0: 186.39,105.73 186.34,106.03
S$616
  Bottom 0: 186.34,106.03 186.21,106.3
S$617
  Bottom 0: 186.21,106.3 186.01,106.52
S$618
  Bottom 0: 186.01,106.52 185.82,106.63
S$619
  Bottom 0: 185.82,106.63 185.82,114.12
S$620
  Bottom 0: 185.82,114.12 185.9,114.2
S$621
  Bottom 0: 185.9,114.2 185.87,114.09
S$622
  Bottom 0: 185.87,114.09 185.87,113.75
S$623
  Bottom 0: 185.87,113.75 185.96,113.41
S$624
  Bottom 0: 185.96,113.41 186.13,113.1
S$625
  Bottom 0: 186.13,113.1 186.37,112.84
S$626
  Bottom 0: 186.37,112.84 186.66,112.65
S$627
  Bottom 0: 186.66,112.65 187,112.55
S$628
  Bottom 0: 187,112.55 187.34,112.53
S$629
  Bottom 0: 187.34,112.53 187.69,112.59
S$630
  Bottom 0: 187.69,112.59 187.88,112.68
S$631
  Bottom 0: 187.88,112.68 191.57,108.99
S$632
  Bottom 0: 191.57,108.99 191.62,108.95
S$633
  Bottom 0: 191.62,108.95 191.68,108.91
S$634
  Bottom 0: 191.68,108.91 191.74,108.89
S$635
  Bottom 0: 191.74,108.89 191.81,108.87
S$636
  Bottom 0: 191.81,108.87 191.88,108.86
S$637
  Bottom 0: 191.88,108.86 196.24,108.86
S$638
  Bottom 0: 196.24,108.86 201.49,103.62
S$639
  Bottom 0: 201.49,103.62 201.23,103.62
S$640
  Bottom 0: 201.23,103.62 200.92,103.53
S$641
  Bottom 0: 200.92,103.53 200.65,103.35
S$642
  Bottom 0: 200.65,103.35 200.43,103.11
S$643
  Bottom 0: 200.43,103.11 200.29,102.81
S$644
  Bottom 0: 200.29,102.81 200.25,102.49
S$645
  Bottom 0: 200.25,102.49 200.29,102.17
S$646
  Bottom 0: 200.29,102.17 200.43,101.87
S$647
  Bottom 0: 200.43,101.87 200.65,101.62
S$648
  Bottom 0: 200.65,101.62 200.92,101.45
S$649
  Bottom 0: 200.92,101.45 201.23,101.36
S$650
  Bottom 0: 201.23,101.36 201.55,101.36
S$651
  Bottom 0: 201.55,101.36 201.86,101.45
S$652
  Bottom 0: 201.86,101.45 202.14,101.62
S$653
  Bottom 0: 202.14,101.62 202.35,101.87
S$654
  Bottom 0: 202.35,101.87 202.49,102.17
S$655
  Bottom 0: 202.49,102.17 202.53,102.49
S$656
  Bottom 0: 202.53,102.49 202.52,102.59
S$657
  Bottom 0: 202.52,102.59 203.49,101.62
S$658
  Bottom 0: 203.49,101.62 203.49,96.19
S$659
  Bottom 0: 203.49,96.19 203.34,96.13
S$660
  Bottom 0: 203.34,96.13 203.04,95.95
S$661
  Bottom 0: 203.04,95.95 202.8,95.69
S$662
  Bottom 0: 202.8,95.69 202.63,95.38
S$663
  Bottom 0: 202.63,95.38 202.54,95.04
S$664
  Bottom 0: 202.54,95.04 202.54,94.7
S$665
  Bottom 0: 202.54,94.7 202.63,94.36
S$666
  Bottom 0: 202.63,94.36 202.8,94.05
S$667
  Bottom 0: 202.8,94.05 203.04,93.79
S$668
  Bottom 0: 203.04,93.79 203.34,93.6
S$669
  Bottom 0: 203.34,93.6 203.66,93.5
S$670
  Bottom 0: 203.66,93.5 204.02,93.48
S$671
  Bottom 0: 204.02,93.48 204.36,93.54
S$672
  Bottom 0: 204.36,93.54 204.55,93.62
S$673
  Bottom 0: 204.55,93.62 205.81,92.36
S$674
  Bottom 0: 205.81,92.36 205.87,92.32
S$675
  Bottom 0: 205.87,92.32 205.93,92.28
S$676
  Bottom 0: 205.93,92.28 205.99,92.25
S$677
  Bottom 0: 205.99,92.25 206.06,92.24
S$678
  Bottom 0: 206.06,92.24 206.13,92.23
S$679
  Bottom 0: 206.13,92.23 215.48,92.23
S$680
  Bottom 0: 215.48,92.23 215.56,92.24
S$681
  Bottom 0: 215.56,92.24 215.62,92.25
S$682
  Bottom 0: 215.62,92.25 215.69,92.28
S$683
  Bottom 0: 215.69,92.28 215.74,92.32
S$684
  Bottom 0: 215.74,92.32 215.8,92.36
S$685
  Bottom 0: 215.8,92.36 216.91,93.48
S$686
  Bottom 0: 216.91,93.48 220.62,93.48
S$687
  Bottom 0: 220.62,93.48 220.5,93.41
S$688
  Bottom 0: 220.5,93.41 220.26,93.15
S$689
  Bottom 0: 220.26,93.15 220.09,92.84
S$690
  Bottom 0: 220.09,92.84 220,92.5
S$691
  Bottom 0: 220,92.5 220,92.16
S$692
  Bottom 0: 220,92.16 220.09,91.82
S$693
  Bottom 0: 220.09,91.82 220.26,91.51
S$694
  Bottom 0: 220.26,91.51 220.5,91.25
S$695
  Bottom 0: 220.5,91.25 220.8,91.06
S$696
  Bottom 0: 220.8,91.06 221.13,90.96
S$697
  Bottom 0: 221.13,90.96 221.48,90.94
S$698
  Bottom 0: 221.48,90.94 221.82,91
S$699
  Bottom 0: 221.82,91 222.14,91.15
S$700
  Bottom 0: 222.14,91.15 222.41,91.37
S$701
  Bottom 0: 222.41,91.37 222.62,91.66
S$702
  Bottom 0: 222.62,91.66 222.74,91.98
S$703
  Bottom 0: 222.74,91.98 222.79,92.33
S$704
  Bottom 0: 222.79,92.33 222.74,92.67
S$705
  Bottom 0: 222.74,92.67 222.62,93
S$706
  Bottom 0: 222.62,93 222.41,93.28
S$707
  Bottom 0: 222.41,93.28 222.17,93.48
S$708
  Bottom 0: 222.17,93.48 223.84,93.48
S$709
  Bottom 0: 223.84,93.48 224.34,92.97
S$710
  Bottom 0: 224.34,92.97 224.4,92.93
S$711
  Bottom 0: 224.4,92.93 224.46,92.89
S$712
  Bottom 0: 224.46,92.89 224.52,92.87
S$713
  Bottom 0: 224.52,92.87 224.59,92.85
S$714
  Bottom 0: 224.59,92.85 224.66,92.85
S$715
  Bottom 0: 224.66,92.85 228.3,92.85
S$716
  Bottom 0: 228.3,92.85 228.37,92.85
S$717
  Bottom 0: 228.37,92.85 228.44,92.87
S$718
  Bottom 0: 228.44,92.87 228.5,92.89
S$719
  Bottom 0: 228.5,92.89 228.56,92.93
S$720
  Bottom 0: 228.56,92.93 228.62,92.97
S$721
  Bottom 0: 228.62,92.97 237.24,101.59
S$722
  Bottom 0: 237.24,101.59 237.24,101.3
S$723
  Bottom 0: 237.24,101.3 237.32,101.01
S$724
  Bottom 0: 237.32,101.01 237.5,100.76
S$725
  Bottom 0: 237.5,100.76 237.73,100.57
S$726
  Bottom 0: 237.73,100.57 238.01,100.46
S$727
  Bottom 0: 238.01,100.46 238.32,100.44
S$728
  Bottom 0: 238.32,100.44 238.57,100.49
S$729
  Bottom 0: 238.57,100.49 245.35,93.71
S$730
  Bottom 0: 245.35,93.71 245.29,93.72
S$731
  Bottom 0: 245.29,93.72 244.94,93.7
S$732
  Bottom 0: 244.94,93.7 244.61,93.59
S$733
  Bottom 0: 244.61,93.59 244.59,93.58
S$734
  Bottom 0: 244.59,93.58 244.02,94.14
S$735
  Bottom 0: 244.02,94.14 243.97,94.18
S$736
  Bottom 0: 243.97,94.18 243.91,94.22
S$737
  Bottom 0: 243.91,94.22 243.84,94.25
S$738
  Bottom 0: 243.84,94.25 243.78,94.26
S$739
  Bottom 0: 243.78,94.26 243.71,94.27
S$740
  Bottom 0: 243.71,94.27 239.15,94.27
S$741
  Bottom 0: 239.15,94.27 239.08,94.4
S$742
  Bottom 0: 239.08,94.4 238.88,94.62
S$743
  Bottom 0: 238.88,94.62 238.61,94.77
S$744
  Bottom 0: 238.61,94.77 238.32,94.84
S$745
  Bottom 0: 238.32,94.84 238.01,94.82
S$746
  Bottom 0: 238.01,94.82 237.73,94.71
S$747
  Bottom 0: 237.73,94.71 237.5,94.52
S$748
  Bottom 0: 237.5,94.52 237.32,94.27
S$749
  Bottom 0: 237.32,94.27 237.24,93.98
S$750
  Bottom 0: 237.24,93.98 237.24,93.67
S$751
  Bottom 0: 237.24,93.67 237.32,93.39
S$752
  Bottom 0: 237.32,93.39 237.5,93.14
S$753
  Bottom 0: 237.5,93.14 237.73,92.95
S$754
  Bottom 0: 237.73,92.95 238.01,92.84
S$755
  Bottom 0: 238.01,92.84 238.32,92.82
S$756
  Bottom 0: 238.32,92.82 238.61,92.88
S$757
  Bottom 0: 238.61,92.88 238.88,93.03
S$758
  Bottom 0: 238.88,93.03 239.08,93.25
S$759
  Bottom 0: 239.08,93.25 239.15,93.39
S$760
  Bottom 0: 239.15,93.39 243.52,93.39
S$761
  Bottom 0: 243.52,93.39 243.96,92.94
S$762
  Bottom 0: 243.96,92.94 243.91,92.84
S$763
  Bottom 0: 243.91,92.84 243.82,92.5
S$764
  Bottom 0: 243.82,92.5 243.82,92.16
S$765
  Bottom 0: 243.82,92.16 243.91,91.82
S$766
  Bottom 0: 243.91,91.82 244.08,91.51
S$767
  Bottom 0: 244.08,91.51 244.32,91.25
S$768
  Bottom 0: 244.32,91.25 244.61,91.06
S$769
  Bottom 0: 244.61,91.06 244.94,90.96
S$770
  Bottom 0: 244.94,90.96 245.29,90.94
S$771
  Bottom 0: 245.29,90.94 245.64,91
S$772
  Bottom 0: 245.64,91 245.95,91.15
S$773
  Bottom 0: 245.95,91.15 246.22,91.37
S$774
  Bottom 0: 246.22,91.37 246.43,91.66
S$775
  Bottom 0: 246.43,91.66 246.56,91.98
S$776
  Bottom 0: 246.56,91.98 246.6,92.33
S$777
  Bottom 0: 246.6,92.33 246.56,92.67
S$778
  Bottom 0: 246.56,92.67 246.51,92.8
S$779
  Bottom 0: 246.51,92.8 260.99,92.8
S$780
  Bottom 0: 260.99,92.8 261.06,92.8
S$781
  Bottom 0: 261.06,92.8 261.13,92.82
S$782
  Bottom 0: 261.13,92.82 261.19,92.84
S$783
  Bottom 0: 261.19,92.84 261.25,92.88
S$784
  Bottom 0: 261.25,92.88 261.3,92.92
S$785
  Bottom 0: 261.3,92.92 268.88,100.5
S$786
  Bottom 0: 268.88,100.5 268.98,100.46
S$787
  Bottom 0: 268.98,100.46 269.28,100.44
S$788
  Bottom 0: 269.28,100.44 269.57,100.5
S$789
  Bottom 0: 269.57,100.5 269.84,100.66
S$790
  Bottom 0: 269.84,100.66 270.04,100.87
S$791
  Bottom 0: 270.04,100.87 270.12,101.04
S$792
  Bottom 0: 270.12,101.04 270.16,100.99
S$793
  Bottom 0: 270.16,100.99 270.2,100.94
S$794
  Bottom 0: 270.2,100.94 276.59,94.54
S$795
  Bottom 0: 276.59,94.54 276.65,94.5
S$796
  Bottom 0: 276.65,94.5 276.7,94.46
S$797
  Bottom 0: 276.7,94.46 276.77,94.43
S$798
  Bottom 0: 276.77,94.43 276.83,94.42
S$799
  Bottom 0: 276.83,94.42 276.91,94.41
S$800
  Bottom 0: 276.91,94.41 280.42,94.41
S$801
  Bottom 0: 280.42,94.41 280.44,94.34
S$802
  Bottom 0: 280.44,94.34 280.61,94.03
S$803
  Bottom 0: 280.61,94.03 280.85,93.78
S$804
  Bottom 0: 280.85,93.78 281.15,93.59
S$805
  Bottom 0: 281.15,93.59 281.48,93.48
S$806
  Bottom 0: 281.48,93.48 281.83,93.46
S$807
  Bottom 0: 281.83,93.46 282.13,93.52
S$808
  Bottom 0: 282.13,93.52 282.24,93.48
S$809
  Bottom 0: 282.24,93.48 282.59,93.46
S$810
  Bottom 0: 282.59,93.46 282.94,93.52
S$811
  Bottom 0: 282.94,93.52 283.25,93.67
S$812
  Bottom 0: 283.25,93.67 283.52,93.9
S$813
  Bottom 0: 283.52,93.9 283.73,94.18
S$814
  Bottom 0: 283.73,94.18 283.86,94.51
S$815
  Bottom 0: 283.86,94.51 283.9,94.85
S$816
  Bottom 0: 283.9,94.85 283.86,95.2
S$817
  Bottom 0: 283.86,95.2 283.73,95.52
S$818
  Bottom 0: 283.73,95.52 283.52,95.81
S$819
  Bottom 0: 283.52,95.81 283.25,96.03
S$820
  Bottom 0: 283.25,96.03 282.94,96.19
S$821
  Bottom 0: 282.94,96.19 282.59,96.25
S$822
  Bottom 0: 282.59,96.25 282.24,96.22
S$823
  Bottom 0: 282.24,96.22 282.13,96.19
S$824
  Bottom 0: 282.13,96.19 281.83,96.25
S$825
  Bottom 0: 281.83,96.25 281.48,96.22
S$826
  Bottom 0: 281.48,96.22 281.15,96.12
S$827
  Bottom 0: 281.15,96.12 280.85,95.93
S$828
  Bottom 0: 280.85,95.93 280.61,95.68
S$829
  Bottom 0: 280.61,95.68 280.44,95.37
S$830
  Bottom 0: 280.44,95.37 280.42,95.3
S$831
  Bottom 0: 280.42,95.3 279.58,95.3
S$832
  Bottom 0: 279.58,95.3 279.95,95.5
S$833
  Bottom 0: 279.95,95.5 280.3,95.78
S$834
  Bottom 0: 280.3,95.78 280.58,96.13
S$835
  Bottom 0: 280.58,96.13 280.8,96.53
S$836
  Bottom 0: 280.8,96.53 280.92,96.95
S$837
  Bottom 0: 280.92,96.95 280.97,97.4
S$838
  Bottom 0: 280.97,97.4 280.92,97.85
S$839
  Bottom 0: 280.92,97.85 280.8,98.27
S$840
  Bottom 0: 280.8,98.27 280.58,98.67
S$841
  Bottom 0: 280.58,98.67 280.3,99.01
S$842
  Bottom 0: 280.3,99.01 279.95,99.3
S$843
  Bottom 0: 279.95,99.3 279.56,99.51
S$844
  Bottom 0: 279.56,99.51 279.3,99.59
S$845
  Bottom 0: 279.3,99.59 284.65,99.59
S$846
  Bottom 0: 284.65,99.59 289.41,94.83
S$847
  Bottom 0: 289.41,94.83 289.21,94.82
S$848
  Bottom 0: 289.21,94.82 288.94,94.71
S$849
  Bottom 0: 288.94,94.71 288.69,94.52
S$850
  Bottom 0: 288.69,94.52 288.53,94.27
S$851
  Bottom 0: 288.53,94.27 288.44,93.98
S$852
  Bottom 0: 288.44,93.98 288.44,93.67
S$853
  Bottom 0: 288.44,93.67 288.53,93.39
S$854
  Bottom 0: 288.53,93.39 288.69,93.14
S$855
  Bottom 0: 288.69,93.14 288.94,92.95
S$856
  Bottom 0: 288.94,92.95 289.21,92.84
S$857
  Bottom 0: 289.21,92.84 289.52,92.82
S$858
  Bottom 0: 289.52,92.82 289.81,92.88
S$859
  Bottom 0: 289.81,92.88 290.08,93.03
S$860
  Bottom 0: 290.08,93.03 290.28,93.25
S$861
  Bottom 0: 290.28,93.25 290.35,93.39
S$862
  Bottom 0: 290.35,93.39 293.54,93.39
S$863
  Bottom 0: 293.54,93.39 293.31,93.14
S$864
  Bottom 0: 293.31,93.14 293.14,92.83
S$865
  Bottom 0: 293.14,92.83 293.12,92.76
S$866
  Bottom 0: 293.12,92.76 288.77,92.76
S$867
  Bottom 0: 288.77,92.76 288.02,93.5
S$868
  Bottom 0: 288.02,93.5 288.04,93.53
S$869
  Bottom 0: 288.04,93.53 288.08,93.83
S$870
  Bottom 0: 288.08,93.83 288.04,94.13
S$871
  Bottom 0: 288.04,94.13 287.9,94.4
S$872
  Bottom 0: 287.9,94.4 287.7,94.62
S$873
  Bottom 0: 287.7,94.62 287.44,94.77
S$874
  Bottom 0: 287.44,94.77 287.14,94.84
S$875
  Bottom 0: 287.14,94.84 286.84,94.82
S$876
  Bottom 0: 286.84,94.82 286.56,94.71
S$877
  Bottom 0: 286.56,94.71 286.32,94.52
S$878
  Bottom 0: 286.32,94.52 286.15,94.27
S$879
  Bottom 0: 286.15,94.27 286.06,93.98
S$880
  Bottom 0: 286.06,93.98 286.06,93.67
S$881
  Bottom 0: 286.06,93.67 286.15,93.39
S$882
  Bottom 0: 286.15,93.39 286.32,93.14
S$883
  Bottom 0: 286.32,93.14 286.56,92.95
S$884
  Bottom 0: 286.56,92.95 286.84,92.84
S$885
  Bottom 0: 286.84,92.84 287.14,92.82
S$886
  Bottom 0: 287.14,92.82 287.39,92.87
S$887
  Bottom 0: 287.39,92.87 288.26,92
S$888
  Bottom 0: 288.26,92 288.32,91.96
S$889
  Bottom 0: 288.32,91.96 288.38,91.92
S$890
  Bottom 0: 288.38,91.92 288.44,91.89
S$891
  Bottom 0: 288.44,91.89 288.51,91.88
S$892
  Bottom 0: 288.51,91.88 288.58,91.87
S$893
  Bottom 0: 288.58,91.87 293.12,91.87
S$894
  Bottom 0: 293.12,91.87 293.14,91.8
S$895
  Bottom 0: 293.14,91.8 293.31,91.49
S$896
  Bottom 0: 293.31,91.49 293.55,91.24
S$897
  Bottom 0: 293.55,91.24 293.84,91.05
S$898
  Bottom 0: 293.84,91.05 294.17,90.94
S$899
  Bottom 0: 294.17,90.94 294.52,90.92
S$900
  Bottom 0: 294.52,90.92 294.83,90.98
S$901
  Bottom 0: 294.83,90.98 294.94,90.94
S$902
  Bottom 0: 294.94,90.94 295.29,90.92
S$903
  Bottom 0: 295.29,90.92 295.63,90.98
S$904
  Bottom 0: 295.63,90.98 295.95,91.14
S$905
  Bottom 0: 295.95,91.14 296.21,91.36
S$906
  Bottom 0: 296.21,91.36 296.42,91.64
S$907
  Bottom 0: 296.42,91.64 296.55,91.97
S$908
  Bottom 0: 296.55,91.97 296.6,92.31
S$909
  Bottom 0: 296.6,92.31 296.55,92.66
S$910
  Bottom 0: 296.55,92.66 296.42,92.98
S$911
  Bottom 0: 296.42,92.98 296.21,93.27
S$912
  Bottom 0: 296.21,93.27 296.07,93.39
S$913
  Bottom 0: 296.07,93.39 296.2,93.39
S$914
  Bottom 0: 296.2,93.39 296.23,93.34
S$915
  Bottom 0: 296.23,93.34 296.27,93.28
S$916
  Bottom 0: 296.27,93.28 297.12,92.43
S$917
  Bottom 0: 297.12,92.43 297.18,92.39
S$918
  Bottom 0: 297.18,92.39 297.24,92.35
S$919
  Bottom 0: 297.24,92.35 297.3,92.32
S$920
  Bottom 0: 297.3,92.32 297.37,92.31
S$921
  Bottom 0: 297.37,92.31 297.44,92.3
S$922
  Bottom 0: 297.44,92.3 298.04,92.3
S$923
  Bottom 0: 298.04,92.3 298.35,92
S$924
  Bottom 0: 298.35,92 298.4,91.96
S$925
  Bottom 0: 298.4,91.96 298.46,91.92
S$926
  Bottom 0: 298.46,91.92 298.53,91.89
S$927
  Bottom 0: 298.53,91.89 298.59,91.88
S$928
  Bottom 0: 298.59,91.88 298.66,91.87
S$929
  Bottom 0: 298.66,91.87 312.16,91.87
S$930
  Bottom 0: 312.16,91.87 312.18,91.8
S$931
  Bottom 0: 312.18,91.8 312.35,91.49
S$932
  Bottom 0: 312.35,91.49 312.59,91.24
S$933
  Bottom 0: 312.59,91.24 312.88,91.05
S$934
  Bottom 0: 312.88,91.05 313.22,90.94
S$935
  Bottom 0: 313.22,90.94 313.57,90.92
S$936
  Bottom 0: 313.57,90.92 313.87,90.98
S$937
  Bottom 0: 313.87,90.98 313.98,90.94
S$938
  Bottom 0: 313.98,90.94 314.33,90.92
S$939
  Bottom 0: 314.33,90.92 314.68,90.98
S$940
  Bottom 0: 314.68,90.98 314.99,91.14
S$941
  Bottom 0: 314.99,91.14 315.26,91.36
S$942
  Bottom 0: 315.26,91.36 315.47,91.64
S$943
  Bottom 0: 315.47,91.64 315.6,91.97
S$944
  Bottom 0: 315.6,91.97 315.64,92.31
S$945
  Bottom 0: 315.64,92.31 315.6,92.66
S$946
  Bottom 0: 315.6,92.66 315.47,92.98
S$947
  Bottom 0: 315.47,92.98 315.26,93.27
S$948
  Bottom 0: 315.26,93.27 314.99,93.49
S$949
  Bottom 0: 314.99,93.49 314.68,93.64
S$950
  Bottom 0: 314.68,93.64 314.33,93.71
S$951
  Bottom 0: 314.33,93.71 313.98,93.69
S$952
  Bottom 0: 313.98,93.69 313.87,93.65
S$953
  Bottom 0: 313.87,93.65 313.57,93.71
S$954
  Bottom 0: 313.57,93.71 313.22,93.69
S$955
  Bottom 0: 313.22,93.69 312.88,93.58
S$956
  Bottom 0: 312.88,93.58 312.59,93.39
S$957
  Bottom 0: 312.59,93.39 312.35,93.14
S$958
  Bottom 0: 312.35,93.14 312.18,92.83
S$959
  Bottom 0: 312.18,92.83 312.16,92.76
S$960
  Bottom 0: 312.16,92.76 298.85,92.76
S$961
  Bottom 0: 298.85,92.76 298.55,93.06
S$962
  Bottom 0: 298.55,93.06 298.49,93.1
S$963
  Bottom 0: 298.49,93.1 298.43,93.14
S$964
  Bottom 0: 298.43,93.14 298.37,93.17
S$965
  Bottom 0: 298.37,93.17 298.3,93.18
S$966
  Bottom 0: 298.3,93.18 298.23,93.19
S$967
  Bottom 0: 298.23,93.19 297.63,93.19
S$968
  Bottom 0: 297.63,93.19 297.03,93.79
S$969
  Bottom 0: 297.03,93.79 297.03,93.83
S$970
  Bottom 0: 297.03,93.83 297.01,93.97
S$971
  Bottom 0: 297.01,93.97 296.94,94.09
S$972
  Bottom 0: 296.94,94.09 296.85,94.18
S$973
  Bottom 0: 296.85,94.18 296.72,94.25
S$974
  Bottom 0: 296.72,94.25 296.59,94.27
S$975
  Bottom 0: 296.59,94.27 290.35,94.27
S$976
  Bottom 0: 290.35,94.27 290.28,94.4
S$977
  Bottom 0: 290.28,94.4 290.2,94.48
S$978
  Bottom 0: 290.2,94.48 299.45,94.48
S$979
  Bottom 0: 299.45,94.48 299.49,94.34
S$980
  Bottom 0: 299.49,94.34 299.66,94.03
S$981
  Bottom 0: 299.66,94.03 299.9,93.78
S$982
  Bottom 0: 299.9,93.78 300.19,93.59
S$983
  Bottom 0: 300.19,93.59 300.52,93.48
S$984
  Bottom 0: 300.52,93.48 300.87,93.46
S$985
  Bottom 0: 300.87,93.46 301.18,93.52
S$986
  Bottom 0: 301.18,93.52 301.29,93.48
S$987
  Bottom 0: 301.29,93.48 301.63,93.46
S$988
  Bottom 0: 301.63,93.46 301.98,93.52
S$989
  Bottom 0: 301.98,93.52 302.3,93.67
S$990
  Bottom 0: 302.3,93.67 302.56,93.9
S$991
  Bottom 0: 302.56,93.9 302.77,94.18
S$992
  Bottom 0: 302.77,94.18 302.9,94.51
S$993
  Bottom 0: 302.9,94.51 302.95,94.85
S$994
  Bottom 0: 302.95,94.85 302.9,95.2
S$995
  Bottom 0: 302.9,95.2 302.77,95.52
S$996
  Bottom 0: 302.77,95.52 302.56,95.81
S$997
  Bottom 0: 302.56,95.81 302.3,96.03
S$998
  Bottom 0: 302.3,96.03 301.98,96.19
S$999
  Bottom 0: 301.98,96.19 301.63,96.25
S$1000
  Bottom 0: 301.63,96.25 301.29,96.22
S$1001
  Bottom 0: 301.29,96.22 301.18,96.19
S$1002
  Bottom 0: 301.18,96.19 300.87,96.25
S$1003
  Bottom 0: 300.87,96.25 300.71,96.24
S$1004
  Bottom 0: 300.71,96.24 300.71,104.95
S$1005
  Bottom 0: 300.71,104.95 300.9,104.77
S$1006
  Bottom 0: 300.9,104.77 301.19,104.62
S$1007
  Bottom 0: 301.19,104.62 301.51,104.55
S$1008
  Bottom 0: 301.51,104.55 301.84,104.57
S$1009
  Bottom 0: 301.84,104.57 302.14,104.68
S$1010
  Bottom 0: 302.14,104.68 302.41,104.87
S$1011
  Bottom 0: 302.41,104.87 302.62,105.12
S$1012
  Bottom 0: 302.62,105.12 302.74,105.42
S$1013
  Bottom 0: 302.74,105.42 302.79,105.74
S$1014
  Bottom 0: 302.79,105.74 302.74,106.06
S$1015
  Bottom 0: 302.74,106.06 302.73,106.08
S$1016
  Bottom 0: 302.73,106.08 303.43,106.78
S$1017
  Bottom 0: 303.43,106.78 312.46,106.78
S$1018
  Bottom 0: 312.46,106.78 312.33,106.72
S$1019
  Bottom 0: 312.33,106.72 312.1,106.5
S$1020
  Bottom 0: 312.1,106.5 311.93,106.22
S$1021
  Bottom 0: 311.93,106.22 311.84,105.91
S$1022
  Bottom 0: 311.84,105.91 311.84,105.58
S$1023
  Bottom 0: 311.84,105.58 311.93,105.27
S$1024
  Bottom 0: 311.93,105.27 312.1,104.99
S$1025
  Bottom 0: 312.1,104.99 312.33,104.77
S$1026
  Bottom 0: 312.33,104.77 312.62,104.62
S$1027
  Bottom 0: 312.62,104.62 312.94,104.56
S$1028
  Bottom 0: 312.94,104.56 313.27,104.58
S$1029
  Bottom 0: 313.27,104.58 313.29,104.59
S$1030
  Bottom 0: 313.29,104.59 314.25,103.62
S$1031
  Bottom 0: 314.25,103.62 313.87,103.62
S$1032
  Bottom 0: 313.87,103.62 313.79,103.61
S$1033
  Bottom 0: 313.79,103.61 313.72,103.57
S$1034
  Bottom 0: 313.72,103.57 313.67,103.52
S$1035
  Bottom 0: 313.67,103.52 313.62,103.44
S$1036
  Bottom 0: 313.62,103.44 313.61,103.37
S$1037
  Bottom 0: 313.61,103.37 313.61,101.59
S$1038
  Bottom 0: 313.61,101.59 313.62,101.51
S$1039
  Bottom 0: 313.62,101.51 313.67,101.44
S$1040
  Bottom 0: 313.67,101.44 313.72,101.39
S$1041
  Bottom 0: 313.72,101.39 313.79,101.35
S$1042
  Bottom 0: 313.79,101.35 313.87,101.34
S$1043
  Bottom 0: 313.87,101.34 316.28,101.34
S$1044
  Bottom 0: 316.28,101.34 316.35,101.35
S$1045
  Bottom 0: 316.35,101.35 316.42,101.39
S$1046
  Bottom 0: 316.42,101.39 316.48,101.44
S$1047
  Bottom 0: 316.48,101.44 316.52,101.51
S$1048
  Bottom 0: 316.52,101.51 316.53,101.59
S$1049
  Bottom 0: 316.53,101.59 316.53,101.81
S$1050
  Bottom 0: 316.53,101.81 316.55,101.78
S$1051
  Bottom 0: 316.55,101.78 316.78,101.59
S$1052
  Bottom 0: 316.78,101.59 317.06,101.48
S$1053
  Bottom 0: 317.06,101.48 317.37,101.46
S$1054
  Bottom 0: 317.37,101.46 317.49,101.49
S$1055
  Bottom 0: 317.49,101.49 317.58,101.43
S$1056
  Bottom 0: 317.58,101.43 317.89,101.34
S$1057
  Bottom 0: 317.89,101.34 318.22,101.34
S$1058
  Bottom 0: 318.22,101.34 318.53,101.43
S$1059
  Bottom 0: 318.53,101.43 318.8,101.61
S$1060
  Bottom 0: 318.8,101.61 319.01,101.85
S$1061
  Bottom 0: 319.01,101.85 319.15,102.15
S$1062
  Bottom 0: 319.15,102.15 319.2,102.47
S$1063
  Bottom 0: 319.2,102.47 319.15,102.79
S$1064
  Bottom 0: 319.15,102.79 319.01,103.09
S$1065
  Bottom 0: 319.01,103.09 318.8,103.34
S$1066
  Bottom 0: 318.8,103.34 318.53,103.52
S$1067
  Bottom 0: 318.53,103.52 318.22,103.61
S$1068
  Bottom 0: 318.22,103.61 317.89,103.61
S$1069
  Bottom 0: 317.89,103.61 317.58,103.52
S$1070
  Bottom 0: 317.58,103.52 317.49,103.46
S$1071
  Bottom 0: 317.49,103.46 317.37,103.48
S$1072
  Bottom 0: 317.37,103.48 317.06,103.46
S$1073
  Bottom 0: 317.06,103.46 316.78,103.35
S$1074
  Bottom 0: 316.78,103.35 316.55,103.17
S$1075
  Bottom 0: 316.55,103.17 316.53,103.14
S$1076
  Bottom 0: 316.53,103.14 316.53,103.37
S$1077
  Bottom 0: 316.53,103.37 316.52,103.44
S$1078
  Bottom 0: 316.52,103.44 316.48,103.52
S$1079
  Bottom 0: 316.48,103.52 316.42,103.57
S$1080
  Bottom 0: 316.42,103.57 316.35,103.61
S$1081
  Bottom 0: 316.35,103.61 316.28,103.62
S$1082
  Bottom 0: 316.28,103.62 315.2,103.62
S$1083
  Bottom 0: 315.2,103.62 315.2,103.74
S$1084
  Bottom 0: 315.2,103.74 315.18,103.8
S$1085
  Bottom 0: 315.18,103.8 315.18,103.86
S$1086
  Bottom 0: 315.18,103.86 315.15,103.91
S$1087
  Bottom 0: 315.15,103.91 315.14,103.97
S$1088
  Bottom 0: 315.14,103.97 315.1,104
S$1089
  Bottom 0: 315.1,104 315.07,104.05
S$1090
  Bottom 0: 315.07,104.05 314.02,105.1
S$1091
  Bottom 0: 314.02,105.1 314.05,105.13
S$1092
  Bottom 0: 314.05,105.13 314.17,105.42
S$1093
  Bottom 0: 314.17,105.42 314.22,105.75
S$1094
  Bottom 0: 314.22,105.75 314.17,106.06
S$1095
  Bottom 0: 314.17,106.06 314.05,106.36
S$1096
  Bottom 0: 314.05,106.36 313.84,106.62
S$1097
  Bottom 0: 313.84,106.62 313.61,106.78
S$1098
  Bottom 0: 313.61,106.78 318.81,106.78
S$1099
  Bottom 0: 318.81,106.78 319.51,106.08
S$1100
  Bottom 0: 319.51,106.08 319.46,105.91
S$1101
  Bottom 0: 319.46,105.91 319.46,105.58
S$1102
  Bottom 0: 319.46,105.58 319.55,105.27
S$1103
  Bottom 0: 319.55,105.27 319.72,104.99
S$1104
  Bottom 0: 319.72,104.99 319.95,104.77
S$1105
  Bottom 0: 319.95,104.77 320.24,104.62
S$1106
  Bottom 0: 320.24,104.62 320.56,104.56
S$1107
  Bottom 0: 320.56,104.56 320.89,104.58
S$1108
  Bottom 0: 320.89,104.58 321.19,104.68
S$1109
  Bottom 0: 321.19,104.68 321.46,104.87
S$1110
  Bottom 0: 321.46,104.87 321.52,104.95
S$1111
  Bottom 0: 321.52,104.95 321.52,97.17